# Altium PCB CH32F&V208C-R0-1v1.PcbDoc (part 1 of 2)
Units mil, origin at the board's own origin, x right, y up, seen from the top; angles counter-clockwise.
Board outline 2952.76 x 3346.46 mil, 2 copper layers (Top Layer, Bottom Layer); 50 components, 65 nets, 277 pads, 818 vias.
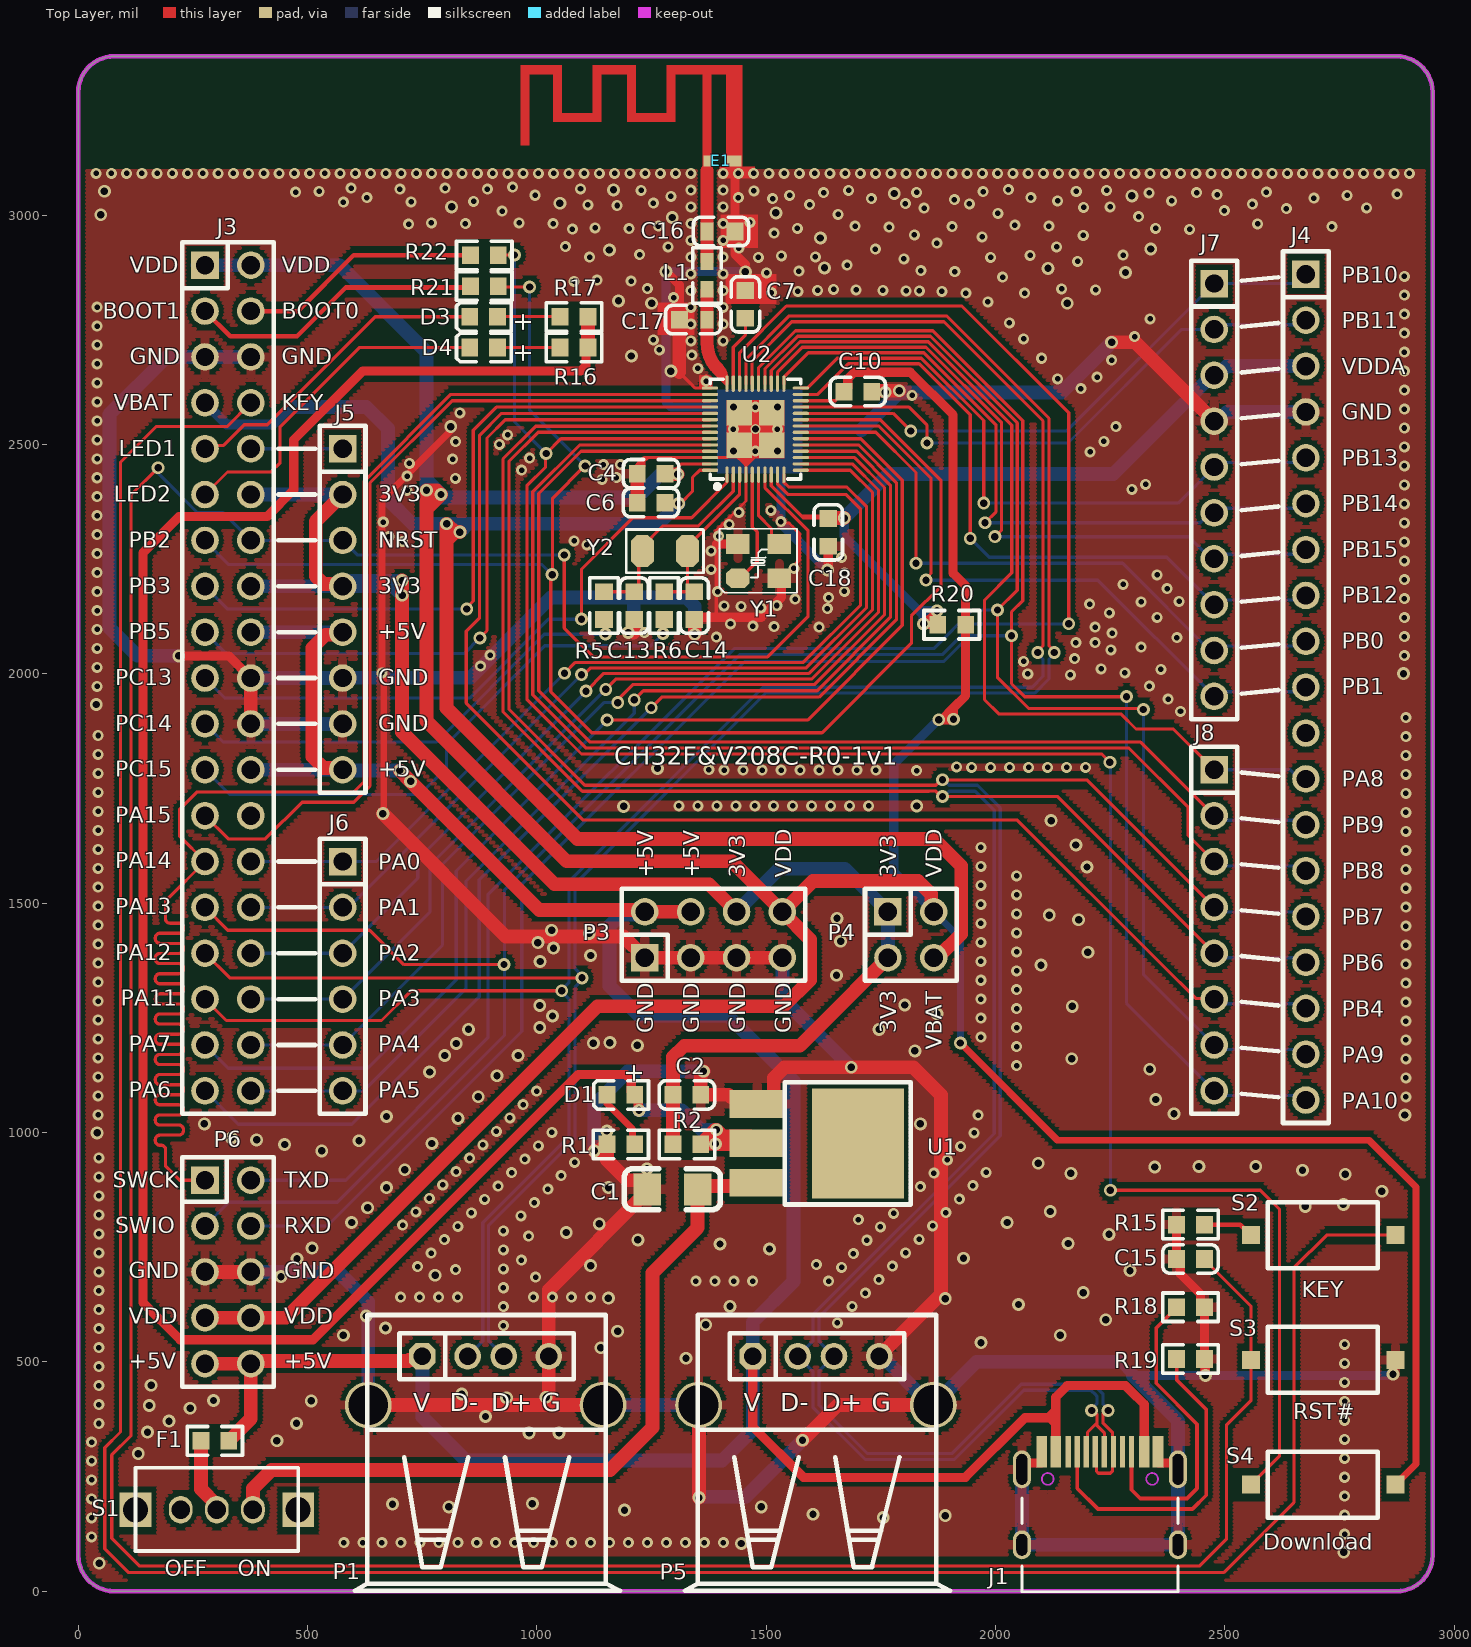
[diagram p0: Top Layer view]
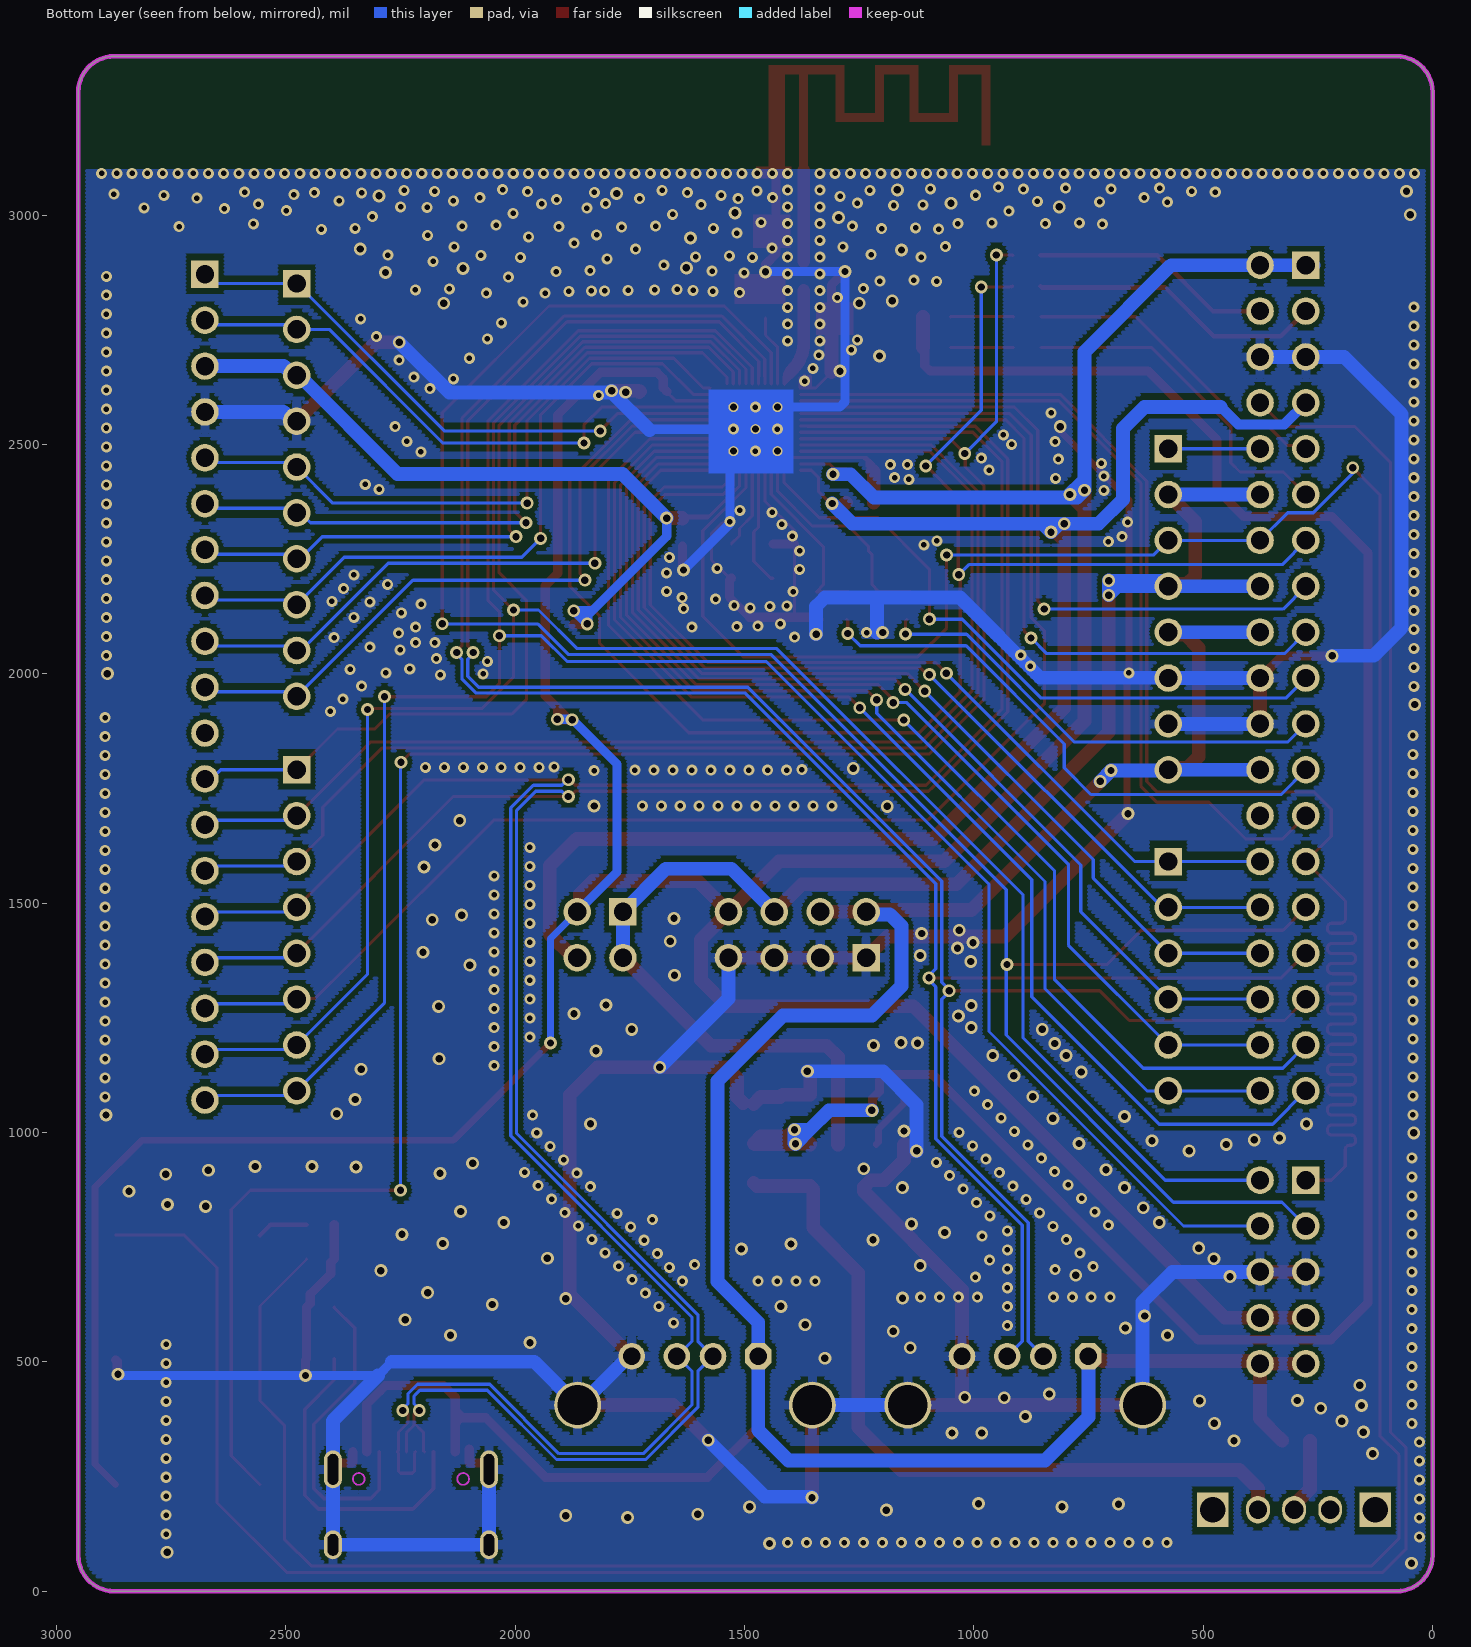
[diagram p1: Bottom Layer view, seen from below]

## Layer stack, top to bottom
Top Solder: solder mask 0.4, Solder Resist, Dk 3.5
Top Layer: signal copper 1.4
Dielectric 1: dielectric 12.6, FR-4, Dk 4.8
Bottom Layer: signal copper 1.4
Bottom Solder: solder mask 0.4, Solder Resist, Dk 3.5

## Board outline
0,78.74 0,3267.72 cw(c78.74,3267.72) 78.74,3346.46 2874.02,3346.46 cw(c2874.02,3267.72) 2952.76,3267.72 2952.76,78.74 cw(c2874.02,78.74) 2874.02,0 78.74,0 cw(c78.74,78.74)

## Design rules (kind name [scope] priority, off if disabled: settings)
Clearance Clearance_2 [InNet('ANT') or InNet('NetC16_2') vs InPolygon] p1: gap=6 ignorepadtopadclearanceinfootprint=FALSE
Clearance Clearance_1 [InPolygon] p2: gap=10 ignorepadtopadclearanceinfootprint=FALSE
Clearance [All] p3: gap=6 ignorepadtopadclearanceinfootprint=FALSE except(5: Arc-Arc Arc-Track Track-Track; 8: Arc-Via Track-Via SMDPad-Via THPad-Via Via-Via Via-Fill Via-Poly Via-Region Via-Hole)
ComponentClearance [All] p1 off: gap=10 collisioncheckmode=3 verticalgap=10 showdistances=FALSE
DiffPairsRouting [All] p1: maxlimit=10 minlimit=6 mostfreqgap=8 toplayer_minwidth=6 toplayer_maxwidth=15 toplayer_prefwidth=8 bottomlayer_minwidth=6 bottomlayer_maxwidth=15 bottomlayer_prefwidth=8 maxuncoupledlength=500
MinimumSolderMaskSliver [All] p1 off: minsoldermaskwidth=10
PolygonConnect PolygonConnect_1 [IsVia] p1: connectstyle=Direct reliefconductorwidth=10 reliefentries=4 polygonreliefangle="90 Angle" airgapwidth=10
PolygonConnect [All] p2: connectstyle=Relief reliefconductorwidth=20 reliefentries=4 polygonreliefangle="90 Angle" airgapwidth=10
RoutingVias [All] p1: holewidth=16 width=28 viastyle="Through Hole" minholewidth=12 minwidth=24 maxholewidth=28 maxwidth=50
SilkToSilkClearance [All] p1 off: silktosilkclearance=10
SilkToSolderMaskClearance [IsPad] p1 off: minsilkscreentomaskgap=10 clearancetoexposedcopper=TRUE
SolderMaskExpansion [All] p1: expansion=2 istentingtop=FALSE
Width [All] p1: maxlimit=100 minlimit=5 preferedwidth=10
25 further rules are at their usual default settings.

## Classes and differential pairs
differential pair NewDifferentialPair2: +PA11 -PA12
differential pair NewDifferentialPair1: +PB6 -PB7

## Components (designator, comment, footprint, x,y, rotation, side; value= is the part's Value field where it differs from the comment)
C1 "10uF" 3216_C 1350.13,876.24 r0 top
C2 "10uF" 0603_C#1 1296.5,1082.24 r0 top
C4 "0.1uF" 0603_C#1 1279.13,2436.24 r180 top
C6 "0.1uF" 0603_C#1 1279.13,2373.24 r180 top
C7 "1uF" 0603_C#1 1454.43,2775.24 r90 top
C10 "0.1uF" 0603_C#1 1729.76,2615.24 r180 top
C13 "12pF" 0603_C#1 1211.9,2118.54 r90 top
C14 "12pF" 0603_C#1 1343.03,2118.54 r90 top
C15 "0.1uF" 0603_C#1 2394.5,724.24 r0 top
C16 "1.8pF" 0603_C#2 1431.8,2964.24 r180 top
C17 "1.8pF" 0603_C#2 1310.5,2772.24 r0 top
C18 "0.1uF" 0603_C#1 1635.13,2338.87 r270 top
D1 "power" 0603+ 1213.13,1082.24 r180 top
D3 "RED" 0603+ 914.13,2778.24 r180 top
D4 "RED" 0603+ 914.13,2711.24 r180 top
E1 "ANTENNA" ANT-F-1-2.4G-1.6mmFR4 1371.53,3118.24 r0 top
F1 "500mA" 0603#1 328.13,328 r180 top
J1 "TYPE-C-Receptacle-2.0" TYPE-C-Receptacle-2.0 2227.35,303.99 r0 top
J3 "HEADER 19x2" IDC38-2.54MM 276.39,2890.89 r0 top locked
J4 "Header 19" SIP19-2.54mm 2676.39,2870.89 r0 top locked
J5 "Header 8" SIP8-2.54mm 576.39,2490.89 r0 top locked
J6 "Header 6" SIP6-2.54MM 576.39,1590.89 r0 top locked
J7 "Header 10" SIP10-2.54mm 2476.39,2850.89 r0 top locked
J8 "Header 8" SIP8-2.54mm 2476.39,1790.89 r0 top locked
L1 "1.8nH" 0603#2 1371.15,2838.24 r90 top
P1 "USB" USBAF 750.43,512.3 r0 top
P3 "HEADER 4x2" IDC8-2.54mm 1235.13,1381.24 r90 top
P4 "Header 2X2" IDC4-2.54mm 1765.13,1481.24 r0 top
P5 "USB" USBAF 1470.43,512.3 r0 top
P6 "LINK" IDC10-2.54mm 276.39,496.24 r0 top
R1 "1K" 0603#1 1152.5,974.24 r0 top
R2 "0Ω" 0603#1 1296.5,974.24 r0 top
R5 "NC(0R)" 0603#1 1146.33,2118.54 r90 top
R6 "NC(0R)" 0603#1 1277.47,2118.54 r90 top
R15 "10K" 0603#1 2394.5,799.24 r0 top
R16 "1K" 0603#1 1111.13,2711.24 r180 top
R17 "1K" 0603#1 1111.13,2778.24 r180 top
R18 "NC(5.1K)" 0603#1 2394.5,619.24 r0 top
R19 "NC(5.1K)" 0603#1 2394.5,506.24 r0 top
R20 "0Ω" 0603#1 1934.63,2107 r180 top
R21 "10K" 0603#1 915.51,2845.24 r180 top
R22 "10K" 0603#1 854.88,2912.24 r0 top
S1 "SW SPDT" SW1 302.13,178 r180 top
S2 "KEY" SMD_6.1x3.65x2.5mm-KEY 2871.38,776.49 r180 top
S3 "RST#" SMD_6.1x3.65x2.5mm-KEY 2871.38,504.49 r180 top
S4 "Download" SMD_6.1x3.65x2.5mm-KEY 2871.38,232.49 r180 top
U1 "1117-3.3V" SOT-223 1480.13,1062.24 r270 top
U2 "CH32V208C" QFN48_5x5 1476.38,2533.41 r0 top
Y1 "32MHz" XT3225 1438.13,2208.44 r0 top
Y2 "32768Hz" FC-135 1229.71,2267.45 r0 top

## Footprints (in the part's own frame and the unit in brackets; to place one, negate y for a bottom-side part, rotate by r counter-clockwise, add the part's x,y. Pads: shape width x height; smd on the part's side, far side on the other; paste and mask are expansions set on the pad)
0603#1 [mm]
  rect 0.93x0.98 smd: 1(0,0) 2(1.54,0)
  silkscreen extent -0.76,-0.79 2.3,0.79
0603#2 [mm]
  rect 0.93x0.714 smd: 1(0,0) 2(1.54,0)
  silkscreen extent -0.76,-0.79 2.3,0.79
0603+ [mm]
  rect 0.93x0.98 smd: 1(0,0) 2(1.54,0)
  silkscreen extent -0.76,-0.79 2.27,0.79
0603_C#1 [mm]
  rect 0.93x0.98 smd: 1(0,0) 2(1.54,0)
  silkscreen extent -0.76,-0.79 2.31,0.79
0603_C#2 [mm]
  rect 0.93x0.98 smd: 1(0,0)
  rect 0.714x0.98 smd: 2(1.54,0)
  silkscreen extent -0.76,-0.79 2.31,0.79
3216_C [mil]
  rect 60x70 smd: 1(0,0) 2(-110,0)
  silkscreen extent -160,-45 50,45
ANT-F-1-2.4G-1.6mmFR4 [mm]
  rect 0.8x0.6 smd mask+0: 0(1.483,0)
  rect 0.4x0.6 smd mask+0: 1(0,0)
  Top Layer region: 0.24,5.027 -0.26,5.027 -0.26,-0.304 0.24,-0.304
  Top Layer region: 1.94,5.002 1.04,5.002 1.04,-0.304 1.94,-0.304
  Top Layer region: 1.94,5.296 -2.26,5.296 -2.26,4.796 1.94,4.796
  Top Layer region: -1.76,4.977 -2.26,4.977 -2.26,2.157 -1.76,2.157
  Top Layer region: -1.85,2.651 -4.39,2.651 -4.39,2.156 -1.85,2.156
  Top Layer region: -3.96,4.976 -4.46,4.976 -4.46,2.156 -3.96,2.156
  Top Layer region: -3.96,5.296 -6.36,5.296 -6.36,4.796 -3.96,4.796
  Top Layer region: -5.86,4.977 -6.36,4.977 -6.36,2.157 -5.86,2.157
  Top Layer region: -5.875,2.657 -8.364,2.657 -8.364,2.157 -5.875,2.157
  Top Layer region: -8.06,4.977 -8.56,4.977 -8.56,2.157 -8.06,2.157
  Top Layer region: -8.06,5.296 -10.36,5.296 -10.36,4.796 -8.06,4.796
  Top Layer region: -9.86,4.976 -10.36,4.976 -10.36,0.856 -9.86,0.856
FC-135 [mil]
  oct 50x70 smd: 1(0,0) 2(98.43,0)
  silkscreen extent -35,-47 133,47
IDC4-2.54mm [mil]
  rect 60x60 hole 40: 1(0,0)
  round 60 hole 40: 2(100,0) 3(0,-100) 4(100,-100)
  silkscreen extent -50,-150 150,50
IDC8-2.54mm [mil]
  rect 60x60 hole 40: 1(0,0)
  round 60 hole 40: 2(100,0) 3(0,-100) 4(100,-100) 5(0,-200) 6(100,-200) 7(0,-300) 8(100,-300)
  silkscreen extent -50,-350 150,50
IDC10-2.54mm [mil]
  rect 60x60 hole 40: 1(0,400)
  round 60 hole 40: 2(100,400) 3(0,300) 4(100,300) 5(0,200) 6(100,200) 7(0,100) 8(100,100) 9(0,0) 10(100,0)
  silkscreen extent -50,-50 150,450
IDC38-2.54MM [mil]
  rect 60x60 hole 40: 1(0,0)
  round 60 hole 40: 2(100,0) 3(0,-100) 4(100,-100) 5(0,-200) 6(100,-200) 7(0,-300) 8(100,-300) 9(0,-400) 10(100,-400) 11(0,-500) 12(100,-500) 13(0,-600) 14(100,-600) 15(0,-700) 16(100,-700) 17(0,-800) 18(100,-800) 19(0,-900) 20(100,-900) 21(0,-1000) 22(100,-1000) 23(0,-1100) 24(100,-1100) 25(0,-1200) 26(100,-1200) 27(0,-1300) 28(100,-1300) 29(0,-1400) 30(100,-1400) 31(0,-1500) 32(100,-1500) 33(0,-1600) 34(100,-1600) 35(0,-1700) 36(100,-1700) 37(0,-1800) 38(100,-1800)
  silkscreen extent -50,-1850 150,50
QFN48_5x5 [mm]
  round 0.559 hole 0.381 mask+0.102: 0(-1.219,-1.219) 0(-1.219,1.219) 0(0,0) 0(1.219,-1.219) 0(1.219,1.219)
  rect 1.397x1.397 smd mask+0: 0(-0.901,-0.895) 0(-0.901,0.908) 0(0.902,-0.895) 0(0.902,0.908)
  oval 0.18x0.9 smd mask+0.051: 1(-1.575,-2.519) 2(-1.225,-2.519) 3(-0.875,-2.519) 4(-0.525,-2.519) 5(-0.175,-2.519) 6(0.175,-2.519) 7(0.525,-2.519) 8(0.875,-2.519) 9(1.225,-2.519) 10(1.575,-2.519) 25(1.575,2.519) 26(1.225,2.519) 27(0.875,2.519) 28(0.525,2.519) 29(0.175,2.519) 30(-0.175,2.519) 31(-0.525,2.519) 32(-0.875,2.519) 33(-1.225,2.519) 34(-1.575,2.519)
  oval 0.9x0.18 smd mask+0.051: 11(2.514,-2.275) 12(2.514,-1.925) 13(2.514,-1.575) 14(2.514,-1.225) 15(2.514,-0.875) 16(2.514,-0.525) 17(2.514,-0.175) 18(2.514,0.175) 19(2.514,0.525) 20(2.514,0.875) 21(2.514,1.225) 22(2.514,1.575) 23(2.514,1.925) 24(2.514,2.275) 35(-2.514,2.275) 36(-2.514,1.925) 37(-2.514,1.575) 38(-2.514,1.225) 39(-2.514,0.875) 40(-2.514,0.525) 41(-2.514,0.175) 42(-2.514,-0.175) 43(-2.514,-0.525) 44(-2.514,-0.875) 45(-2.514,-1.225) 46(-2.514,-1.575) 47(-2.514,-1.925) 48(-2.514,-2.275)
  silkscreen extent -2.51,-3.31 2.51,2.77
SIP6-2.54MM [mil]
  rect 60x60 hole 40: 1(0,0)
  round 60 hole 40: 2(0,-100) 3(0,-200) 4(0,-300) 5(0,-400) 6(0,-500)
  silkscreen extent -50,-550 50,50
SIP8-2.54mm [mil]
  rect 60x60 hole 40: 1(0,0)
  round 60 hole 40: 2(0,-100) 3(0,-200) 4(0,-300) 5(0,-400) 6(0,-500) 7(0,-600) 8(0,-700)
  silkscreen extent -50,-750 50,50
SIP10-2.54mm [mil]
  rect 60x60 hole 40: 1(0,0)
  round 60 hole 40: 2(0,-100) 3(0,-200) 4(0,-300) 5(0,-400) 6(0,-500) 7(0,-600) 8(0,-700) 9(0,-800) 10(0,-900)
  silkscreen extent -50,-950 50,50
SIP19-2.54mm [mil]
  rect 60x60 hole 40: 1(0,0)
  round 60 hole 40: 2(0,-100) 3(0,-200) 4(0,-300) 5(0,-400) 6(0,-500) 7(0,-600) 8(0,-700) 9(0,-800) 10(0,-900) 11(0,-1000) 12(0,-1100) 13(0,-1200) 14(0,-1300) 15(0,-1400) 16(0,-1500) 17(0,-1600) 18(0,-1700) 19(0,-1800)
  silkscreen extent -50,-1850 50,50
SMD_6.1x3.65x2.5mm-KEY [mm]
  rect 1x1 smd: 1(0,0) 2(8,0)
  silkscreen extent 0.98,-1.83 7.08,1.83
SOT-223 [mil]
  rect 60x120 smd: 1(0,0) 2(86,0) 3(172,0)
  rect 240x200 smd: ""(86,220)
  silkscreen extent -47,60 219,335
SW1 [mm]
  rect 1.75x1.9 hole 1.4: 0(-4.5,0) 0(4.5,0)
  oval 1.321x1.524 hole 1.016: 1(0,0) 2(-2,0) 3(2,0)
  silkscreen extent -4.51,-2.31 4.5,2.29
TYPE-C-Receptacle-2.0 [mm]
  oval 1x1.6 hole 0.6 slot 1.2 at 90 deg: 0(-4.32,-5.15) 0(4.32,-5.15)
  oval 1x2.1 hole 0.6 slot 1.7 at 90 deg: 0(-4.32,-0.97) 0(4.32,-0.97)
  rect 0.6x1.75 smd mask+0.051: A1(-3.225,0) A4(-2.45,0) B1(3.225,0) B4(2.45,0)
  rect 0.3x1.75 smd mask+0.051: A5(-1.25,0) A6(-0.25,0) A7(0.25,0) A8(1.25,0) B5(1.75,0) B6(0.75,0) B7(-0.75,0) B8(-1.75,0)
  Keep-Out Layer circle w0.1: c-2.89,-1.5 r0.325
  Keep-Out Layer circle w0.1: c2.89,-1.5 r0.325
  silkscreen extent -4.32,-7.75 4.32,-2.55
USBAF [mm]
  round 2.6 hole 2.2: 0(-3,-2.7) 0(10,-2.7)
  oct 1.473x1.473 hole 0.965: 1(0,0)
  round 1.473 hole 0.965: 2(2.5,0) 3(4.5,0) 4(7,0)
  silkscreen extent -3.75,-12.99 10.95,2.29
XT3225 [mm]
  oct 1.3x1.1 smd: 1(0,0)
  rect 1.3x1.1 smd: 2(2.3,0) 3(2.3,1.9) 4(0,1.9)
  silkscreen extent -1.02,-0.8 3.27,2.74

## Part data
C1 C2 C4 C6 C7 C10 C13 C14 C15 C16 C17 C18: library part CAP, "Capacitor"
D1 D3 D4: library part LED0, "Typical INFRARED GaAs LED", LatestRevisionDate=08-Jul-2005, LatestRevisionNote="Mech Layer 1 removed.", PackageDescription="LED; 2 Leads", PackageReference=LED-0, Published=8-Jun-2000, Publisher="Altium Limited"
E1: "Generic Antenna"
F1: library part FUSE1, "Fuse"
J1: "Type-C USB2.0 母座"
J3: "Header, 19-Pin, Dual row"
J4: "Header, 19-Pin", LatestRevisionDate=17-Jul-2002, LatestRevisionNote="Re-released for DXP Platform.", Publisher="Altium Limited"
J5 J8: "Header, 8-Pin", LatestRevisionDate=17-Jul-2002, LatestRevisionNote="Re-released for DXP Platform.", Publisher="Altium Limited"
J6: "Header, 6-Pin", LatestRevisionDate=17-Jul-2002, LatestRevisionNote="Re-released for DXP Platform.", Publisher="Altium Limited"
J7: "Header, 10-Pin", LatestRevisionDate=17-Jul-2002, LatestRevisionNote="Re-released for DXP Platform.", Publisher="Altium Limited"
L1: library part INDUCTOR
P1 P5: "USB Port"
P3: "Header, 4-Pin, Dual row"
P4: "Header, 2-Pin, Dual row", LatestRevisionDate=17-Jul-2002, LatestRevisionNote="Re-released for DXP Platform.", Publisher="Altium Limited"
P6: library part "Header 5X2H", "Header, 5-Pin, Dual row, Right Angle", LatestRevisionDate=17-Jul-2002, LatestRevisionNote="Re-released for DXP Platform.", Publisher="Altium Limited"
R1 R2 R5 R6 R15 R16 R17 R18 R19: library part RES
R20: library part R
R21 R22: library part Res2, "Resistor"
S2 S3 S4: library part KEY1
U2: "RISC-V BLE5.3 MCU, 10M Ethernet, 2*USB, CAN"
Y1 Y2: library part XTAL, "Crystal Oscillator", LatestRevisionDate=17-Jul-2002, LatestRevisionNote="Re-released for DXP Platform.", PackageDescription="Crystal, Thru-Hole; 2 Leads; Body 3.1 x 8.2 mm (Dia.xH)", PackageReference=R38, Published=8-Jun-2000, Publisher="Altium Limited"

## Via types
v1: diameter 24, hole 12, Top Layer to Bottom Layer, tented both sides, 587 vias
v2: diameter 28, hole 16, Top Layer to Bottom Layer, tented both sides, 231 vias

## Nets (pads, with @x,y where several pads share a name; then routed paths per layer and width w, separated by ;. In a path a pad name is that pad's centre, name@x,y a point inside that pad or via, vN(x,y) a via of type N, cw(c..) or ccw(c..) an arc to the next point about the centre after c; other vN are vias at no path point)
3V3: C2.1 J3.12 J3.16 J5.2 J5.4 P3.6 P4.1 P4.3 R2.1 | length 3466.2
  Top Layer w30: J5.4@576.39,2190.89 571.47,2195.81 535.25,2195.81 517.67,2213.38 517.67,2332.17 J5.2@576.39,2390.89 ; v2(706.13,2203.24) v2(706.13,2171.24) 706.13,1873.24 1038.13,1541.24 1375.13,1541.24 P3.6@1435.13,1481.24 ; R2.1@1296.5,974.24 1296.5,1066.24 C2.1@1296.5,1082.24 1296.5,1164.61 1321.13,1189.24 1573.13,1189.24 1620.13,1236.24 P4.3@1765.13,1381.24
  Bottom Layer w30: J3.16@376.39,2190.89 J5.4@575.49,2190.89 ; J3.12@380.13,2396.24 385.49,2390.89 J5.2@576.39,2390.89 ; P3.6@1435.13,1481.24 1529.13,1575.24 1671.13,1575.24 P4.1@1765.13,1481.24 P4.3@1765.13,1381.24 ; 675.13,2202.24 686.49,2190.89 ; 675.13,2202.24 705.13,2202.24 v2(706.13,2203.24) v2(706.13,2171.24) 686.49,2190.89 ; 675.13,2202.24 587.75,2202.24 J5.4@576.39,2190.89 686.49,2190.89
3V3S: D1.1 R2.2 R16.1 R17.1 U1.2 | length 5013.2
  Top Layer w20: R16.1@1107.12,2711.24 1107.12,2671.96 1095.41,2660.24 620.24,2660.24 470,2510 470,2401 412,2343 220,2343 141.13,2264.13 141.13,629.24 222.13,548.24 511.98,548.24 1090.23,1126.5 1193.93,1126.5 1205.65,1114.78 1205.65,1089.73 1220.97,1074.41 1220.97,1049.92 v2(1222.5,1048.39)
  Top Layer w30: R16.1@1111.13,2711.24 R17.1@1111.13,2778.24 ; R2.2@1357.13,974.24 R2.2@1357.13,975.23 ; v2(1389.13,975.24) v2@1391.13,975.24 ; R2.2@1357.13,975.23 1357.13,976.24 R2.2@1358.15,976.24 ; R2.2@1357.13,975.23 R2.2@1358.15,976.24 ; R2.2@1358.15,976.24 v2@1391.13,976.24 ; R2.2@1358.15,976.24 1388.15,1006.24 v2(1391.13,1006.24) ; v2@1391.13,975.24 v2@1391.13,976.24 ; v2@1391.13,975.24 1479.13,975.24 U1.2@1480.13,976.24 ; v2@1391.13,976.24 U1.2@1480.13,976.24 ; v2@1391.13,976.24 v2(1391.13,1006.24) ; v2(1391.13,1006.24) 1406.13,991.24 1465.13,991.24 U1.2@1480.13,976.24
  Bottom Layer w30: v2(1222.5,1048.39) 1315.98,1048.39 1358.13,1006.24 ; 1358.13,1006.24 v2(1389.13,975.24) 1391.13,977.24 v2(1391.13,1006.24) 1358.13,1006.24
+5V: F1.1 J1.A4 J1.B4 J3.18 J3.24 J5.5 J5.8 P1.1 P3.2 P3.4 P5.1 P6.9 P6.10 | length 6204.4
  Top Layer w20: P5.1@1470.43,512.3 1470.43,358.95 1581.13,248.24 1934.13,248.24 2064.13,378.24 2114.83,378.24 ; J1.A4@2130.89,303.99 2130.89,365.83 ; J1.B4@2323.8,303.99 2323.8,407.57 2294.1,437.28 2283.13,448.24 2156.13,448.24 2130.89,423 2130.89,394.3 ; 2114.83,378.24 2118.48,378.24 ; 2114.83,378.24 2130.89,394.3 ; 2118.48,378.24 2130.89,378.24 ; 2118.48,378.24 2130.89,365.83 ; 2130.89,365.83 2130.89,378.24 ; 2130.89,378.24 2130.89,394.3
  Top Layer w30: P6.9@276.39,496.24 P6.10@376.39,496.24 ; F1.1@328.13,328 328.13,328.98 331.44,332.29 332.43,332.29 376.39,376.26 P6.10@376.39,496.24 ; J5.8@576.39,1790.89 572.31,1794.97 534.41,1794.97 510.13,1819.24 510.13,2056.24 539.04,2085.15 570.65,2085.15 J5.5@576.39,2090.89 ; v2(701.13,1789.24) v2(724.69,1765.69) 1005.13,1485.24 P3.2@1235.13,1485.24 ; P1.1@750.43,512.3 742.15,504.01 720.63,504.01 718.86,502.24 403.6,502.24 403.35,501.98 382.13,501.98 P6.10@376.39,496.24 ; P3.2@1235.13,1481.24 P3.4@1335.13,1481.24
  Bottom Layer w30: J3.24@376.39,1790.89 J5.8@576.39,1790.89 578.04,1789.24 v2(701.13,1789.24) v2(724.69,1765.69) ; J3.18@376.39,2090.89 J5.5@576.39,2090.89 ; P1.1@750.43,512.3 750.43,379.95 845.13,285.24 1404.13,285.24 1470.43,351.54 P5.1@1470.43,512.3 1470.43,586.54 1559.13,675.24 1559.13,1112.24 1416.13,1255.24 1222.13,1255.24 1158.13,1319.24 1158.13,1450.24 1183.39,1475.5 1229.39,1475.5 P3.2@1235.13,1481.24
ANT: C17.2 L1.1 U2.34 | length 337.1
  Top Layer w7: 1384.83,2663.64 ccw(c1388.55,2663.64) 1385.92,2661.01 ; 1386.22,2657.81 U2.34@1413.09,2630.94 ; 1391.73,2660.64 1410.52,2641.85 cw(c1401.23,2632.57) U2.34@1414.37,2632.57 ; 1396.53,2665.64 1403.59,2658.58 cw(c1377.58,2632.57) U2.34@1414.37,2632.57 ; 1401.83,2671.84 cw(c1371.57,2641.58) 1414.37,2641.58 U2.34@1414.37,2632.57
  Top Layer w28.1: L1.1@1371.13,2835.83 C17.2@1371.13,2772.24 1371.13,2720.84 ccw(c1451.03,2720.84) 1394.53,2664.34
BOOT0: R22.2 S4.2 U2.43 | length 4694.7
  Top Layer w7: R22.2@915.51,2912.24 916.51,2913.24 v2(951.13,2913.24) ; v2@1019.94,2480.44 1052.24,2512.74 U2.43@1377.4,2512.74 ; v2(1020.13,2480.24) 1018.86,2478.98 1018.86,2450.86 978.13,2410.13 978.13,1944.24 1097.13,1825.24 2231.13,1825.24 v2(2249.13,1807.24) ; v2(2250.13,874.24) 2577.13,874.24 2619.13,832.24 2619.13,295.2 S4.2@2556.42,232.49
  Bottom Layer w7: v2(951.13,2913.24) 951.13,2549.24 v2(1020.13,2480.24) ; v2(2250.13,874.24) v2@2250.13,1807.24
BOOT1: J3.13 R21.1 U2.19 | length 3470.7
  Top Layer w7: R21.1@915.51,2845.24 917.51,2843.24 919.51,2845.24 921.51,2843.24 v2(984.13,2843.24) ; v2(1033.13,2216.24) 1030,2213.11 1030,1961.38 1119.63,1871.74 1621.74,1871.74 1816.34,2066.34 1816.34,2126.34 1881.13,2191.13 1881.13,2421.34 1748.4,2554.07 U2.19@1575.35,2554.07 ; v2@1034.13,2216.24 1034.13,2383.24 1104.13,2453.24 v2(1105.13,2453.24)
  Bottom Layer w7: J3.13@276.39,2290.89 276.39,2289.99 328.13,2238.24 1011.13,2238.24 v2(1033.13,2216.24) ; v2@984.13,2844.73 984.13,2574.24 v2(1105.13,2453.24)
CC1: J1.A5 R19.1 | length 715.5
  Top Layer w8: J1.A5@2178.13,303.99 2178.13,224.24 2223.13,179.24 2428.93,179.24 2459.13,209.45 2459.13,396.24 2394.5,460.87 R19.1@2394.5,506.24
CC2: J1.B5 R18.1 | length 692.9
  Top Layer w8: J1.B5@2296.24,303.99 2296.24,221.13 2315.13,202.24 2417.13,202.24 2439.13,224.24 2439.13,364.24 2350.13,453.24 2350.13,573.89 2394.5,618.26 R18.1@2394.5,619.24